# EAGLE board Trabalho_Final_CD_Tinkercad (EAGLE 9.7.0)

Size 421.21 x 152.16 mm. Coordinates in mm from the lower left corner, seen from the top.
Outline: 0,0 421.21,0 421.21,152.16 0,152.16 0,0
Copper layers (1*16): Top 0.035mm / dielectric 1.5mm / Bottom 0.035mm
Design rules "default": minimum track width 6mil, minimum drill 0.35mm, track to track 6mil, track to pad 6mil, pad to pad 6mil, via to via 6mil, smd to smd 6mil, copper to edge 40mil, drill to drill 6mil, minimum pad ring 10mil, minimum via ring 8mil, stop-mask expansion 4mil, vias tented up to drill 0mil, thermal gap 10mil

## Footprints (pad centres in the part's own frame; a part is rotated, then mirrored left to right if it is on the bottom)
LEDRD254W60D565H860B = drill 0.981 pad 1.581: 1 -1.27,0; 2 1.27,0
BATTERY-GENERIC = drill 1.118 pad 3.15 octagon: + 2.54,0; - -2.54,0
RESAD1016W63L850D250B = drill 0.83 pad 1.43: 1 -5.08,0; 2 5.08,0
SWITCH-MOMENTARY-PTH-6.5MM = drill 1.016 pad 1.88: 1 -3.251,2.261; 2 3.251,2.261; 3 -3.251,-2.261; 4 3.251,-2.261
78B04ST = drill 0.8: 1 -3.81,-3.81; 2 -1.27,-3.81; 3 1.27,-3.81; 4 3.81,-3.81; 5 3.81,3.81; 6 1.27,3.81; 7 -1.27,3.81; 8 -3.81,3.81
DIP762W53P254L1969H508Q14B = drill 0.743 pad 1.343: 1 -3.81,7.62; 2 -3.81,5.08; 3 -3.81,2.54; 4 -3.81,0; 5 -3.81,-2.54; 6 -3.81,-5.08; 7 -3.81,-7.62; 8 3.81,-7.62; 9 3.81,-5.08; 10 3.81,-2.54; 11 3.81,0; 12 3.81,2.54; 13 3.81,5.08; 14 3.81,7.62

## Placement (x,y rotation side)
D1  RED  [LEDRD254W60D565H860B]  415.15,80.35 0 top
D2  RED  [LEDRD254W60D565H860B]  338.73,136.73 0 top
D3  RED  [LEDRD254W60D565H860B]  341.12,21.89 0 top
P1  BATTERYGENERIC  [BATTERY-GENERIC]  8.26,136.82 180 top
R1  1k  [RESAD1016W63L850D250B]  45.03,126.12 90 top
R2  560  [RESAD1016W63L850D250B]  332.38,134.19 0 top
R3  1k  [RESAD1016W63L850D250B]  47.57,126.12 90 top
R4  1k  [RESAD1016W63L850D250B]  50.11,126.12 90 top
R5  1k  [RESAD1016W63L850D250B]  52.65,126.12 90 top
R6  1k  [RESAD1016W63L850D250B]  274.18,67.65 90 top
R7  1k  [RESAD1016W63L850D250B]  276.72,67.65 90 top
R8  1k  [RESAD1016W63L850D250B]  279.26,67.65 90 top
R9  1k  [RESAD1016W63L850D250B]  281.8,67.65 90 top
R10  560  [RESAD1016W63L850D250B]  408.8,77.81 0 top
R11  1k  [RESAD1016W63L850D250B]  47.2,8.97 90 top
R12  1k  [RESAD1016W63L850D250B]  49.74,8.97 90 top
R13  1k  [RESAD1016W63L850D250B]  52.28,8.97 90 top
R14  1k  [RESAD1016W63L850D250B]  54.82,8.97 90 top
R15  560  [RESAD1016W63L850D250B]  334.77,19.35 0 top
S1  SWITCH_MOMENTARY  [SWITCH-MOMENTARY-PTH-6.5MM]  291.96,84.16 90 top
SW1  SPST-478B04ST  [78B04ST]  48.84,142.63 0 top
SW2  SPST-478B04ST  [78B04ST]  277.99,84.16 0 top
SW3  SPST-478B04ST  [78B04ST]  51.01,25.48 0 top
U1  74HC04_PDIP  [DIP762W53P254L1969H508Q14B]  67.89,142.63 90 top
U2  74HC08_PDIP  [DIP762W53P254L1969H508Q14B]  88.21,142.63 90 top
U3  74HC11_PDIP  [DIP762W53P254L1969H508Q14B]  149.17,142.63 90 top
U4  74HC32_PDIP  [DIP762W53P254L1969H508Q14B]  189.81,142.63 90 top
U5  74HC08_PDIP  [DIP762W53P254L1969H508Q14B]  108.53,142.63 90 top
U6  74HC08_PDIP  [DIP762W53P254L1969H508Q14B]  128.85,142.63 90 top
U7  74HC11_PDIP  [DIP762W53P254L1969H508Q14B]  169.49,142.63 90 top
U8  74HC32_PDIP  [DIP762W53P254L1969H508Q14B]  223.16,143.08 90 top
U9  74HC32_PDIP  [DIP762W53P254L1969H508Q14B]  243.48,143.08 90 top
U10  74HC08_PDIP  [DIP762W53P254L1969H508Q14B]  263.8,143.08 90 top
U11  74HC86_PDIP  [DIP762W53P254L1969H508Q14B]  289.2,143.08 90 top
U12  74HC08_PDIP  [DIP762W53P254L1969H508Q14B]  309.74,84.16 90 top
U13  74HC04_PDIP  [DIP762W53P254L1969H508Q14B]  312.06,143.08 90 top
U14  74HC04_PDIP  [DIP762W53P254L1969H508Q14B]  70.06,25.48 90 top
U15  74HC08_PDIP  [DIP762W53P254L1969H508Q14B]  90.38,25.48 90 top
U16  74HC08_PDIP  [DIP762W53P254L1969H508Q14B]  110.7,25.48 90 top
U17  74HC08_PDIP  [DIP762W53P254L1969H508Q14B]  131.02,25.48 90 top
U18  74HC11_PDIP  [DIP762W53P254L1969H508Q14B]  151.34,25.48 90 top
U19  74HC11_PDIP  [DIP762W53P254L1969H508Q14B]  171.66,25.48 90 top
U20  74HC32_PDIP  [DIP762W53P254L1969H508Q14B]  191.98,25.48 90 top
U21  74HC32_PDIP  [DIP762W53P254L1969H508Q14B]  225.55,25.7 90 top
U22  74HC32_PDIP  [DIP762W53P254L1969H508Q14B]  245.87,25.7 90 top
U23  74HC08_PDIP  [DIP762W53P254L1969H508Q14B]  266.19,25.7 90 top
U24  74HC86_PDIP  [DIP762W53P254L1969H508Q14B]  291.59,25.7 90 top
U25  74HC04_PDIP  [DIP762W53P254L1969H508Q14B]  314.45,25.7 90 top
U26  74HC08_PDIP  [DIP762W53P254L1969H508Q14B]  337.68,84.16 90 top
U27  74HC32_PDIP  [DIP762W53P254L1969H508Q14B]  365.62,84.16 90 top
U28  74HC08_PDIP  [DIP762W53P254L1969H508Q14B]  391.02,84.16 90 top

## Library data of the parts
D1-D3 = Tinkercad; CATEGORY: Opto-Electronic; SUB-CATEGORY: LED; VALUE: LED_RED
P1 R1-R15 S1 SW1-SW3 U1-U28 = Tinkercad

## Nets
D1_A: D1.1 R10.2
D2_A: D2.1 R2.2
D3_A: D3.1 R15.2
P1+: P1.+ S1.1 S1.2 SW1.5 SW1.6 SW1.7 SW1.8 SW2.5 SW2.6 SW2.7 SW2.8 SW3.5 SW3.6 SW3.7 SW3.8 U1.14 U2.14 U3.14 U4.14 U5.14 U6.14 U7.14 U8.14 U9.14 U10.14 U11.14 U12.14 U13.14 U14.14 U15.14 U16.14 U17.14 U18.14 U19.14 U20.14 U21.14 U22.14 U23.14 U24.14 U25.14 U26.14 U27.14 U28.14
P1-: D1.2 D2.2 D3.2 P1.- R1.1 R3.1 R4.1 R5.1 R6.1 R7.1 R8.1 R9.1 R11.1 R12.1 R13.1 R14.1 U1.7 U2.7 U3.7 U4.7 U5.7 U6.7 U7.7 U8.7 U9.7 U10.7 U11.7 U12.7 U13.7 U14.7 U15.7 U16.7 U17.7 U18.7 U19.7 U20.7 U21.7 U22.7 U23.7 U24.7 U25.7 U26.7 U27.7 U28.7
U1_1A: R1.2 SW1.1 U1.1 U2.4 U3.11 U6.13 U10.1
U1_1Y: U1.2 U2.13 U5.1 U6.1 U7.1 U7.3 U7.11
U1_2A: R3.2 SW1.2 U1.3 U2.5 U3.1 U3.3 U6.2 U7.2
U1_2Y: U1.4 U5.2 U7.4 U7.10 U10.2
U1_3A: R4.2 SW1.3 U1.5 U2.1 U3.4 U3.10 U5.4 U6.4 U10.4
U1_3Y: U1.6 U2.10 U2.12 U3.2 U5.10 U7.5 U7.13
U1_6A: R5.2 SW1.4 U1.13 U2.2 U3.9 U5.5 U6.5 U10.5
U1_6Y: U1.12 U2.9 U3.5 U3.13 U5.9 U6.12 U7.9
U2_1Y: U2.3 U4.1
U2_2Y: U2.6 U4.2
U2_3Y: U2.8 U8.13
U2_4Y: U2.11 U4.10
U3_1Y: U3.12 U4.13
U3_2Y: U3.6 U4.9
U3_3Y: U3.8 U4.5
U4_1Y: U4.3 U4.12
U4_2Y: U4.6 U11.5
U4_3Y: U4.4 U4.8
U4_4Y: U4.11 U11.1
U5_1Y: U5.3 U5.13
U5_2Y: U5.6 U5.12
U5_3Y: U5.8 U9.2
U5_4Y: U5.11 U8.12
U6_1Y: U6.3 U6.10
U6_2Y: U6.6 U6.9
U6_3Y: U6.8 U9.13
U6_4Y: U6.11 U8.9
U7_1Y: U7.12 U8.10
U7_2Y: U7.6 U8.4
U7_3Y: U7.8 U8.5
U8_1Y: U8.3 U11.9
U8_2Y: U8.6 U9.1
U8_3Y: U8.2 U8.8
U8_4Y: U8.1 U8.11
U9_1Y: U9.3 U9.12
U9_3Y: U9.8 U11.12
U9_4Y: U9.10 U9.11
U10_1Y: U10.3 U10.13
U10_2Y: U10.6 U10.12
U10_4Y: U9.9 U10.11
U11_1B: R6.2 SW2.1 U11.2 U24.13
U11_1Y: U11.3 U13.1
U11_2A: R7.2 SW2.2 U11.4 U24.10
U11_2Y: U11.6 U13.3
U11_3B: R8.2 SW2.3 U11.10 U24.1
U11_3Y: U11.8 U13.5
U11_4B: R9.2 SW2.4 U11.13 U24.4
U11_4Y: U11.11 U13.9
U12_1Y: U12.3 U12.10
U12_2Y: U12.6 U12.9
U12_4A: S1.3 S1.4 U12.12 U26.10 U28.2
U12_4B: U12.8 U12.13
U12_4Y: R2.1 U12.11 U27.13
U13_1Y: U12.1 U13.2
U13_2Y: U12.2 U13.4
U13_3Y: U12.4 U13.6
U13_4Y: U12.5 U13.8
U14_1A: R11.2 SW3.1 U14.1 U15.4 U16.10 U18.11 U23.1
U14_1Y: U14.2 U15.13 U16.1 U17.4 U19.1 U19.3 U19.11
U14_2A: R12.2 SW3.2 U14.3 U15.5 U17.5 U18.1 U18.3 U19.2
U14_2Y: U14.4 U16.2 U19.4 U19.10 U23.2
U14_3Y: U14.6 U15.10 U15.12 U17.1 U18.2 U19.5 U19.13
U14_4A: R14.2 SW3.4 U14.9 U15.2 U16.5 U17.12 U18.9 U23.12
U14_4Y: U14.8 U15.9 U16.9 U17.2 U18.5 U18.13 U19.9
U15_1Y: U15.3 U20.1
U15_2Y: U15.6 U20.12 U24.12
U15_3Y: U15.8 U21.13
U15_4Y: U15.11 U20.10
U16_1Y: U16.3 U16.13
U16_2Y: U16.6 U16.12
U16_3Y: U16.8 U21.9
U16_4Y: U16.11 U21.12
U17_1Y: U17.3 U22.1
U17_2Y: U17.6 U17.9
U17_3Y: U17.8 U22.2
U17_4Y: U17.10 U17.11
U18_1Y: U18.12 U20.2
U18_2B: R13.2 SW3.3 U14.5 U15.1 U16.4 U17.13 U18.4 U18.10 U23.13
U18_2Y: U18.6 U20.9
U18_3Y: U18.8 U20.5
U19_1Y: U19.12 U21.10
U19_2Y: U19.6 U21.4
U19_3Y: U19.8 U21.5
U20_1Y: U20.3 U20.13
U20_2Y: U20.6 U24.9
U20_3Y: U20.4 U20.8
U21_1Y: U21.3 U24.2
U21_2Y: U21.6 U22.5
U21_3Y: U21.2 U21.8
U21_4Y: U21.1 U21.11
U22_1Y: U22.3 U22.4
U22_2Y: U22.6 U22.10
U22_3Y: U22.8 U24.5
U23_1Y: U23.3 U23.4
U23_2B: U23.5 U23.11
U23_2Y: U22.9 U23.6
U24_1Y: U24.3 U25.5
U24_2Y: U24.6 U25.9
U24_3Y: U24.8 U25.3
U24_4Y: U24.11 U25.1
U25_1Y: U25.2 U26.1
U25_2Y: U25.4 U26.2
U25_3Y: U25.6 U26.4
U25_4Y: U25.8 U26.5
U26_1Y: U26.3 U26.13
U26_2Y: U26.6 U26.12
U26_3A: U26.9 U26.11
U26_3Y: R15.1 U26.8 U27.12
U27_4Y: U27.11 U28.1 U28.13
U28_1Y: U28.3 U28.12
U28_4Y: R10.1 U28.11

## Tracks (layer width: path | path; a pad name or v marks a point on that pad's centre or on a via)
D1_A  (1 unrouted)
D2_A  (1 unrouted)
D3_A  (1 unrouted)
P1+  (42 unrouted)
P1-  (43 unrouted)
U1_1A  (6 unrouted)
U1_1Y  (6 unrouted)
U1_2A  (7 unrouted)
U1_2Y  (4 unrouted)
U1_3A  (8 unrouted)
U1_3Y  (6 unrouted)
U1_6A  (7 unrouted)
U1_6Y  (6 unrouted)
U2_1Y  (1 unrouted)
U2_2Y  (1 unrouted)
U2_3Y  (1 unrouted)
U2_4Y  (1 unrouted)
U3_1Y  (1 unrouted)
U3_2Y  (1 unrouted)
U3_3Y  (1 unrouted)
U4_1Y  (1 unrouted)
U4_2Y  (1 unrouted)
U4_3Y  (1 unrouted)
U4_4Y  (1 unrouted)
U5_1Y  (1 unrouted)
U5_2Y  (1 unrouted)
U5_3Y  (1 unrouted)
U5_4Y  (1 unrouted)
U6_1Y  (1 unrouted)
U6_2Y  (1 unrouted)
U6_3Y  (1 unrouted)
U6_4Y  (1 unrouted)
U7_1Y  (1 unrouted)
U7_2Y  (1 unrouted)
U7_3Y  (1 unrouted)
U8_1Y  (1 unrouted)
U8_2Y  (1 unrouted)
U8_3Y  (1 unrouted)
U8_4Y  (1 unrouted)
U9_1Y  (1 unrouted)
U9_3Y  (1 unrouted)
U9_4Y  (1 unrouted)
U10_1Y  (1 unrouted)
U10_2Y  (1 unrouted)
U10_4Y  (1 unrouted)
U11_1B  (3 unrouted)
U11_1Y  (1 unrouted)
U11_2A  (3 unrouted)
U11_2Y  (1 unrouted)
U11_3B  (3 unrouted)
U11_3Y  (1 unrouted)
U11_4B  (3 unrouted)
U11_4Y  (1 unrouted)
U12_1Y  (1 unrouted)
U12_2Y  (1 unrouted)
U12_4A  (4 unrouted)
U12_4B  (1 unrouted)
U12_4Y  (2 unrouted)
U13_1Y  (1 unrouted)
U13_2Y  (1 unrouted)
U13_3Y  (1 unrouted)
U13_4Y  (1 unrouted)
U14_1A  (6 unrouted)
U14_1Y  (6 unrouted)
U14_2A  (7 unrouted)
U14_2Y  (4 unrouted)
U14_3Y  (6 unrouted)
U14_4A  (7 unrouted)
U14_4Y  (6 unrouted)
U15_1Y  (1 unrouted)
U15_2Y  (2 unrouted)
U15_3Y  (1 unrouted)
U15_4Y  (1 unrouted)
U16_1Y  (1 unrouted)
U16_2Y  (1 unrouted)
U16_3Y  (1 unrouted)
U16_4Y  (1 unrouted)
U17_1Y  (1 unrouted)
U17_2Y  (1 unrouted)
U17_3Y  (1 unrouted)
U17_4Y  (1 unrouted)
U18_1Y  (1 unrouted)
U18_2B  (8 unrouted)
U18_2Y  (1 unrouted)
U18_3Y  (1 unrouted)
U19_1Y  (1 unrouted)
U19_2Y  (1 unrouted)
U19_3Y  (1 unrouted)
U20_1Y  (1 unrouted)
U20_2Y  (1 unrouted)
U20_3Y  (1 unrouted)
U21_1Y  (1 unrouted)
U21_2Y  (1 unrouted)
U21_3Y  (1 unrouted)
U21_4Y  (1 unrouted)
U22_1Y  (1 unrouted)
U22_2Y  (1 unrouted)
U22_3Y  (1 unrouted)
U23_1Y  (1 unrouted)
U23_2B  (1 unrouted)
U23_2Y  (1 unrouted)
U24_1Y  (1 unrouted)
U24_2Y  (1 unrouted)
U24_3Y  (1 unrouted)
U24_4Y  (1 unrouted)
U25_1Y  (1 unrouted)
U25_2Y  (1 unrouted)
U25_3Y  (1 unrouted)
U25_4Y  (1 unrouted)
U26_1Y  (1 unrouted)
U26_2Y  (1 unrouted)
U26_3A  (1 unrouted)
U26_3Y  (2 unrouted)
U27_4Y  (2 unrouted)
U28_1Y  (1 unrouted)
U28_4Y  (1 unrouted)